# Altium PCB PCB_PDB_V4.PcbDoc (part 2 of 2)
Units mm, origin at the board's own origin, x right, y up, seen from the top; angles counter-clockwise.
Board outline 70 x 60 mm, 4 copper layers (Top Layer, Int1, Int2, Bottom Layer), stack 1.649 mm thick; 78 components, 35 nets, 262 pads, 129 vias.
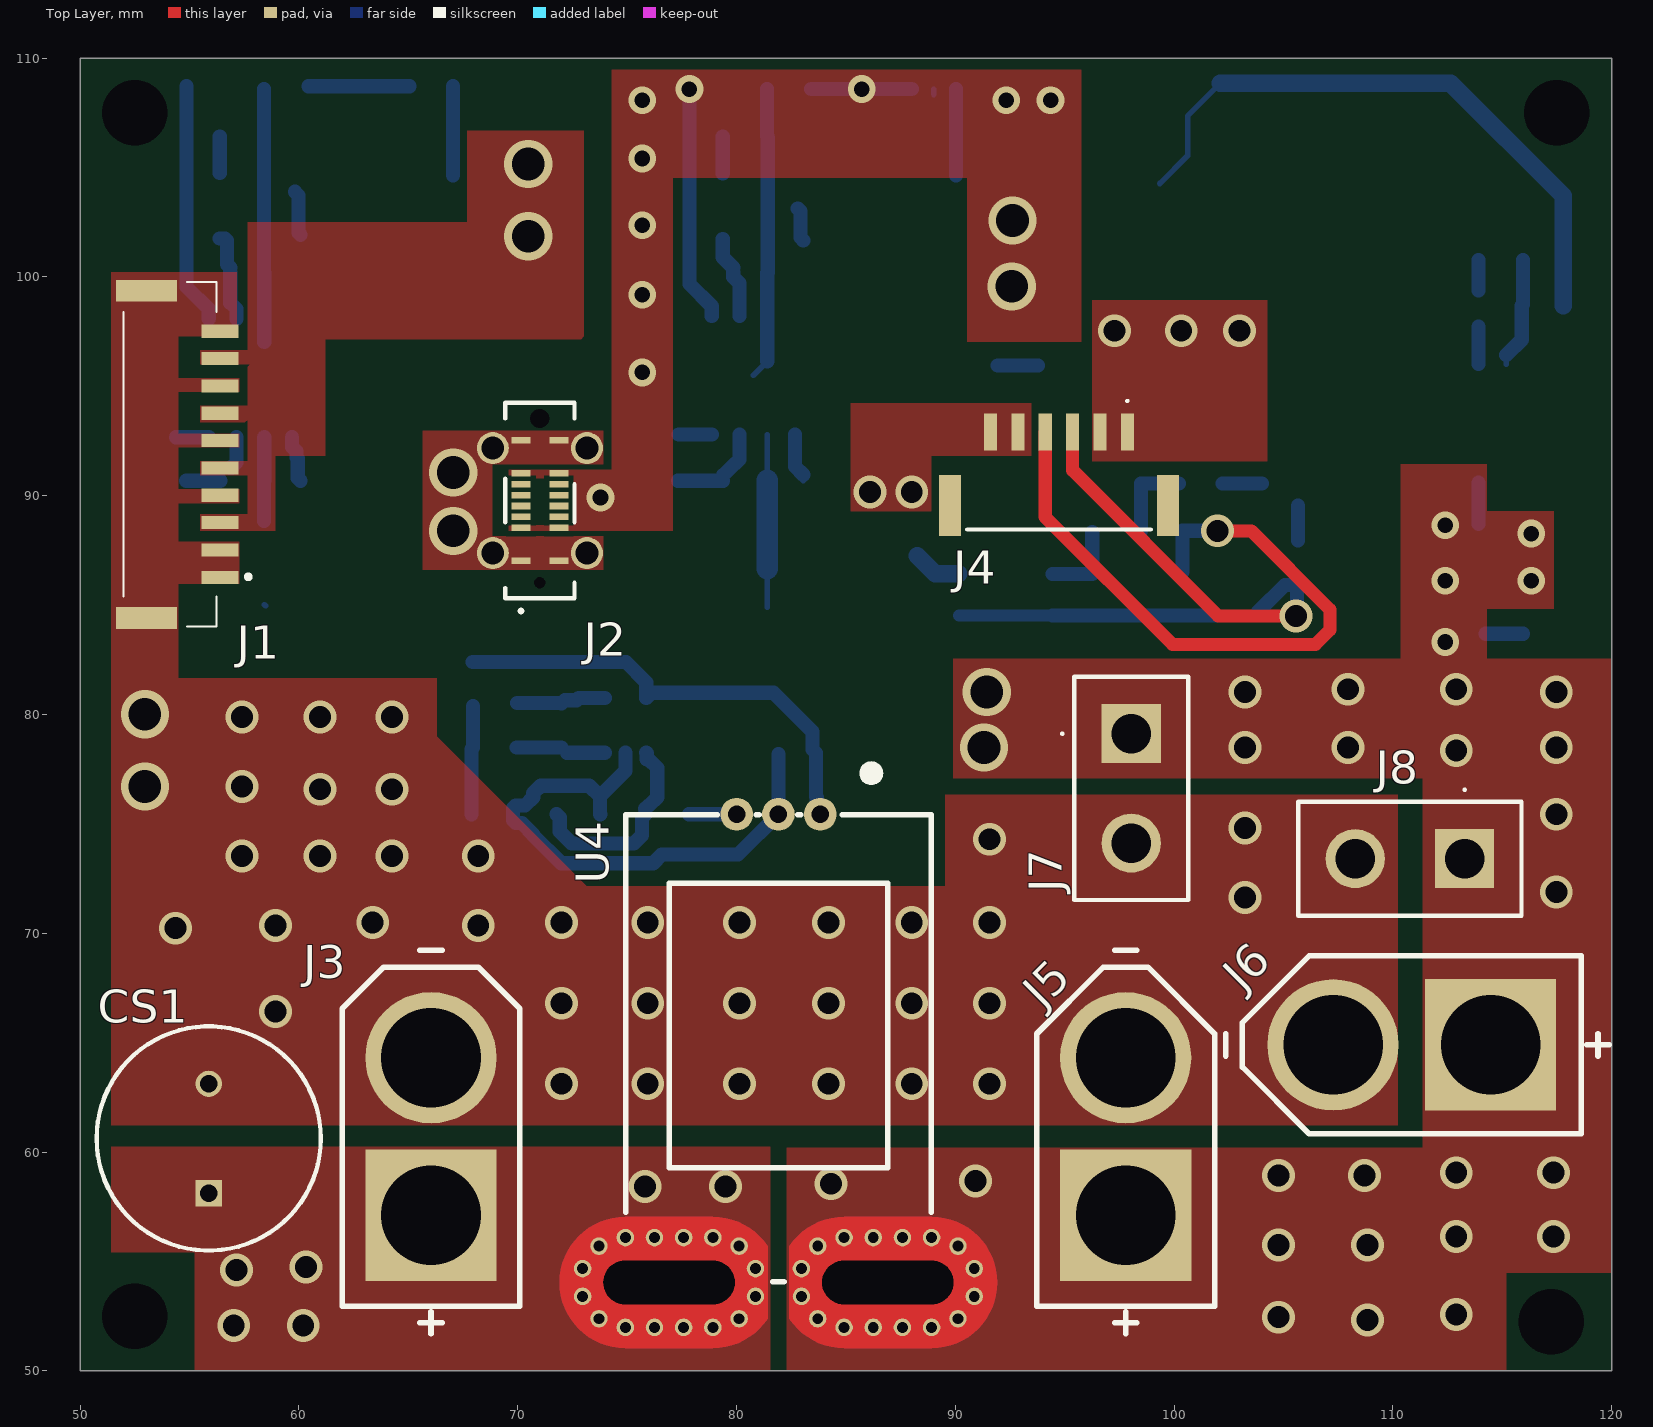
[diagram p0: Top Layer view]

## Polygon pours and split planes (outlines as drawn) (continued)
"+22.2V BATTERY" on Int2 "+22.2V_BATTERY_L03_P038" (solid, pour order 38): 77.216,83.82 77.216,92.329 81.915,92.329 81.915,83.82
"+22.2V BATTERY" on Int2 "+22.2V_BATTERY_L03_P037" (solid, pour order 37): 110.363,91.44 114.3,91.44 114.3,89.281 117.348,89.281 117.348,84.836 114.3,84.836 114.3,82.55 120.015,82.55 120.015,54.483 115.189,54.483 115.189,50.038 82.296,50.038 82.296,60.198 111.379,60.198 111.379,60.325 111.379,77.089 89.916,77.089 89.916,82.55 110.363,82.55

## Text inside footprints (layer, text, board x,y; h text height)
L1: Bottom Overlay "REFDES" at 106.236,103.632 h1.27; Bottom Overlay "RefDes" at 105.918,103.632 h1.27; Mechanical 13 "RefDes2" at 106.236,103.632 h1.27